# Altium PCB STM32F103RCT_EVK.PcbDoc (part 2 of 2)
Units mil, origin at the board's own origin, x right, y up, seen from the top; angles counter-clockwise.
Board outline 2500 x 1900 mil, 2 copper layers (Top Layer, Bottom Layer); 76 components, 81 nets, 397 pads, 87 vias.
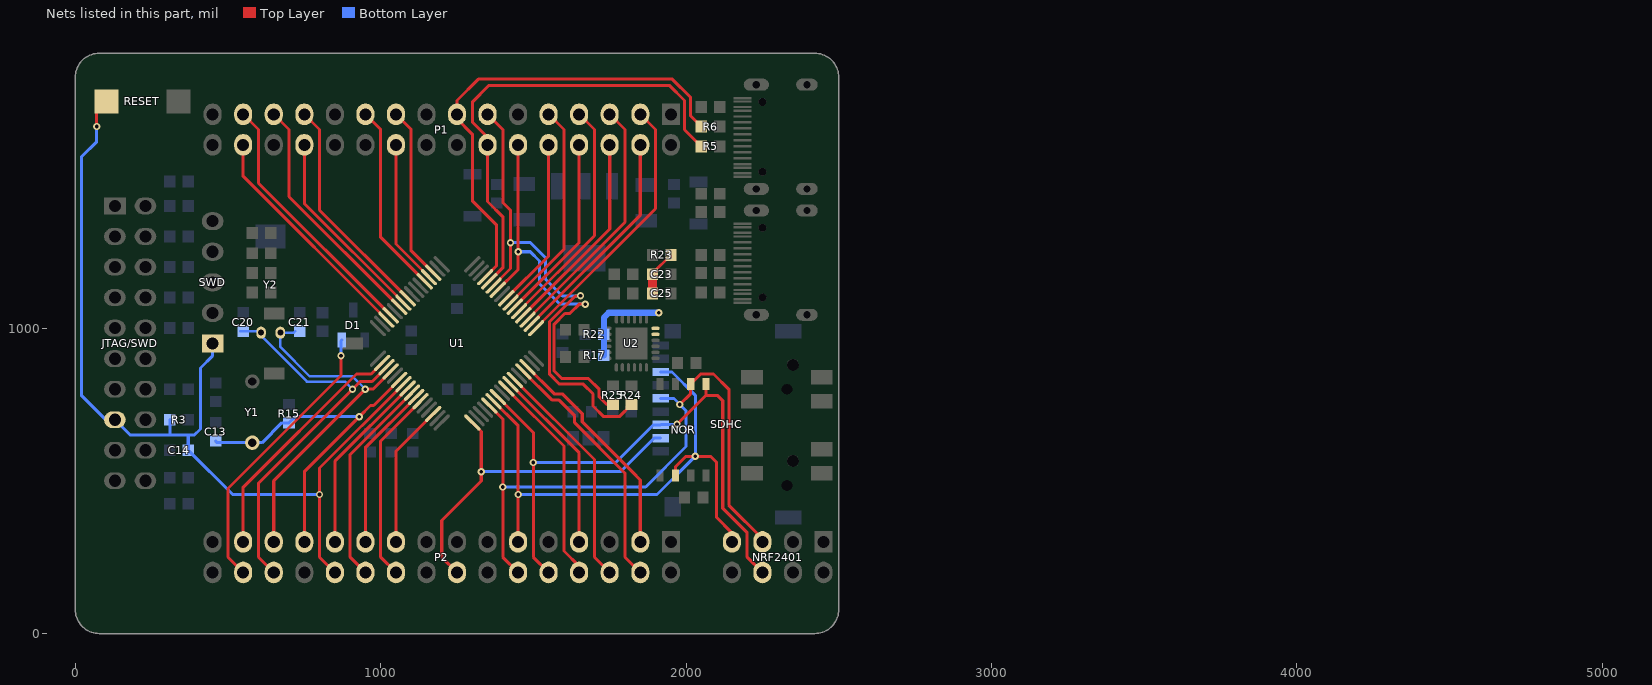
[diagram p2: the nets of this part, all layers, seen from the top]

## Via types
v1: diameter 24, hole 12, Top Layer to Bottom Layer, tented both sides, 87 vias

## Nets (pads, with @x,y where several pads share a name; then routed paths per layer and width w, separated by ;. In a path a pad name is that pad's centre, name@x,y a point inside that pad or via, vN(x,y) a via of type N, cw(c..) or ccw(c..) an arc to the next point about the centre after c; other vN are vias at no path point) (continued)
OSCOUT: C13.2 P2.25 R15.2 U1.6 Y1.1 | length 1175.3
  Top Layer w10: P2.25@750,300 750,530 924.8,704.8 v1@935.2,704.8 ; v1(930,710) 966.78,746.78 977.18,746.78 U1.6@1060.7,830.29
  Bottom Layer w10: C13.2@460,630 464.88,625.12 Y1.1@580,625.12 611.97,625.12 676.54,689.68 R15.2@700,689.68 720.32,710 v1(930,710)
PA0: P2.19 U1.14 | length 469.5
  Top Layer w10: P2.19@1050,300 1050,596.89 U1.14@1172.05,718.94
PA3: P2.16 SDHC.2 U1.17 | length 1211.5
  Top Layer w10: P2.16@1250,200 1200,250 1200,370 1330,500 1329.41,500.59 v1(1329.41,530) 1329.41,660.62 1330,661.21 U1.17@1300.11,691.1
  Bottom Layer w10: v1(1329.41,530) 1785,530 1894.84,639.84 SDHC.2@1916.93,639.84
PA5: NOR.6 NRF2401.5 P2.12 SDHC.5 U1.21 | length 2244.3
  Top Layer w10: U1.21@1355.79,746.78 1400,702.56 v1(1400,480) 1400,250 P2.12@1450,200 ; v1(1979.69,750) 2015,785.31 NOR.6@2015,817.23 2047.77,850 2090,850 2140,800 2140,420.31 2250,310.31 NRF2401.5@2250,300
  Bottom Layer w10: v1(1400,480) 1867.47,480 2000,612.53 2000,729.69 v1(1979.69,750) ; SDHC.5@1916.93,769.76 1960.24,769.76 v1@1979.84,750.16
PA6: NOR.2 NRF2401.7 P2.11 SDHC.7 U1.22 | length 1936
  Top Layer w10: U1.22@1369.71,760.7 1450,680.4 v1(1450,455.02) P2.11@1450,300 ; NOR.2@1965,518.02 1965,545 2000,580 v1(2030.1,580) 2080,580 2100,560 2100,380 2150,330 NRF2401.7@2150,300
  Bottom Layer w10: v1(1450,455.02) 1905.02,455.02 2030,580 v1(2030.1,580) 2030.1,779.9 1953.62,856.38 SDHC.7@1916.93,856.38
PA7: NOR.5 NRF2401.6 P2.10 SDHC.3 U1.23 | length 2015.3
  Top Layer w10: U1.23@1383.63,774.62 1500,658.24 v1(1500,560) 1500,250 P2.10@1550,200 ; v1(1970,685) 2065,780 ; NOR.5@2065,817.23 2065,780 ; NRF2401.6@2250,200 2200,250 2200,330 2120,410 2120,762.23 2102.23,780 2065,780
  Bottom Layer w10: v1(1500,560) 1770,560 1893.15,683.15 SDHC.3@1916.93,683.15 1918.78,685 v1(1970,685)
PA9: P1.12 R25.2 U1.42 | length 1372.2
  Top Layer w10: U1.42@1383.63,1125.38 1450.31,1192.06 1450,1192.37 v1(1450,1250) P1.12@1450,1600 ; v1(1670,1078.44) 1650.02,1078.44 1619.52,1047.95 1602.95,1047.95 1568.11,1013.11 1568.11,859.36 1592.47,835 1680,835 1715.22,799.78 1715.22,774.9 1740.43,749.68 R25.2@1760.47,749.68
  Bottom Layer w10: v1(1450,1250) 1490,1250 1520,1220 1520,1145.32 1586.87,1078.44 v1(1670,1078.44)
PA10: P1.13 R24.2 U1.43 | length 1631.8
  Top Layer w10: P1.13@1350,1700 1400,1650 1400,1411.47 1425.39,1386.08 v1(1425.39,1280) 1425.39,1194.98 U1.43@1369.71,1139.3 ; v1(1654.57,1105.43) 1654.13,1105 1637.37,1105 1552.11,1019.74 1552.11,850.12 1585.86,816.37 1663.63,816.37 1695,785 1695,745 1730,710 1781.42,710 R24.2@1821.1,749.68
  Bottom Layer w10: v1(1425.39,1280) 1490,1280 1540,1230 1540,1160.32 1594.88,1105.43 v1(1654.57,1105.43)
PA11: P1.14 R5.2 U1.44 | length 1557.8
  Top Layer w10: U1.44@1355.79,1153.22 1400,1197.44 1400,1364.61 1350,1414.61 P1.14@1350,1600 1350,1625 1300,1675 1300,1740 1355,1795 1945,1795 1995,1745 1995,1649.59 R5.2@2049.69,1594.9
PA12: P1.15 R6.2 U1.45 | length 1575.8
  Top Layer w10: U1.45@1341.87,1167.14 1380,1205.27 1380,1337.06 1300.11,1416.95 1300.11,1634.89 1250,1685 P1.15@1250,1700 1250,1745 1320,1815 1955,1815 2015,1755 2015,1694.59 R6.2@2049.69,1659.9
PB0: P2.7 U1.26 | length 609.4
  Top Layer w10: U1.26@1425.39,816.37 1650,591.76 P2.7@1650,300
PB1: P2.6 U1.27 | length 759
  Top Layer w10: U1.27@1439.3,830.29 1700,569.6 1700,250 P2.6@1750,200
PB5: P1.25 U1.57 | length 742.7
  Top Layer w10: P1.25@750,1700 800,1650 800,1386.08 U1.57@1088.54,1097.55
PB6: P1.26 U1.58 | length 650.8
  Top Layer w10: P1.26@750,1600 750,1408.24 U1.58@1074.62,1083.63
PB7: P1.27 U1.59 | length 800.4
  Top Layer w10: P1.27@650,1700 700,1650 700,1430.4 U1.59@1060.7,1069.71
PB8: P1.29 U1.61 | length 858.1
  Top Layer w10: P1.29@550,1700 600,1650 600,1474.73 U1.61@1032.86,1041.87
PB9: P1.30 U1.62 | length 766.3
  Top Layer w10: P1.30@550,1600 550,1496.89 U1.62@1018.94,1027.95
PB10: P2.4 U1.29 | length 829.9
  Top Layer w10: U1.29@1467.14,858.13 1560.28,765 1582.86,765 1635,712.86 1635,690.27 1800,525.27 1800,250 P2.4@1850,200
PB11: P2.3 U1.30 | length 740.6
  Top Layer w10: U1.30@1481.06,872.05 1568.11,785 1595,785 1660,720 1660,693.11 1825.1,528.01 1825.1,527.74 1850,502.84 P2.3@1850,300
PB12: P1.3 U1.33 | length 882.6
  Top Layer w10: U1.33@1508.9,1000.11 1900,1391.21 1900,1650 P1.3@1850,1700
PB13: P1.4 U1.34 | length 733
  Top Layer w10: U1.34@1494.98,1014.03 1494.98,1014.98 1850,1370 P1.4@1850,1600
PB14: P1.5 U1.35 | length 824.9
  Top Layer w10: U1.35@1481.06,1027.95 1800,1346.89 1800,1650 P1.5@1750,1700
PB15: P1.6 U1.36 | length 675.3
  Top Layer w10: U1.36@1467.14,1041.87 1750,1324.73 P1.6@1750,1600
PC0: P2.23 U1.8 | length 601.3
  Top Layer w10: P2.23@850,300 850,563.92 U1.8@1088.54,802.45
PC1: P2.22 U1.9 | length 693.1
  Top Layer w10: P2.22@950,200 900,250 900,586.08 U1.9@1102.45,788.53
PC2: P2.21 U1.10 | length 543.5
  Top Layer w10: P2.21@950,300 950,608.24 U1.10@1116.37,774.62
PC3: P2.20 U1.11 | length 635.4
  Top Layer w10: P2.20@1050,200 1000,250 1000,630.4 U1.11@1130.29,760.7
PC5: P2.8 U1.25 | length 701.3
  Top Layer w10: U1.25@1411.47,802.45 1600,613.92 1600,270 1650,220 P2.8@1650,200
PC6: P1.7 U1.37 | length 767.1
  Top Layer w10: U1.37@1453.22,1055.79 1700,1302.56 1700,1650 P1.7@1650,1700
PC7: P1.8 U1.38 | length 617.6
  Top Layer w10: U1.38@1439.3,1069.71 1650,1280.4 P1.8@1650,1600
PC8: P1.9 U1.39 | length 709.4
  Top Layer w10: U1.39@1425.39,1083.63 1600,1258.24 1600,1650 P1.9@1550,1700
PC9: P1.10 U1.40 | length 559.8
  Top Layer w10: U1.40@1411.47,1097.55 1550,1236.08 P1.10@1550,1600
PC10: P1.19 U1.51 | length 569.5
  Top Layer w10: P1.19@1050,1700 1100,1650 1100,1253.11 U1.51@1172.05,1181.06
PC11: P1.20 U1.52 | length 477.6
  Top Layer w10: P1.20@1050,1600 1050,1275.27 U1.52@1158.13,1167.14
PC12: P1.21 U1.53 | length 627.2
  Top Layer w10: P1.21@950,1700 1000,1650 1000,1297.44 U1.53@1144.21,1153.22
PC13: P2.29 U1.2 | length 802.7
  Top Layer w10: P2.29@550,300 550,479.21 920.79,850 969.05,850 U1.2@1005.02,885.97
PC14: C20.2 P2.28 U1.3 Y2.1 | length 1335.6
  Top Layer w10: P2.28@650,200 600,250 600,492.05 v1(907.95,800) 933.07,825.12 972,825.12 U1.3@1018.94,872.05
  Bottom Layer w8: C20.2@540,989.69 593.86,989.69 598.5,985.04 758.43,825.12 882.84,825.12 v1(907.95,800)
PC15: C21.2 P2.27 U1.4 Y2.2 | length 1164.2
  Top Layer w10: P2.27@650,300 650,500 v1(950,800) 974.73,800 U1.4@1032.86,858.13
  Bottom Layer w8: C21.2@720,989.69 715.35,985.04 Y2.2@671.5,985.04 671.5,938.19 767.69,842 908,842 v1(950,800)
RESET: C14.2 JTAG/SWD.15 P2.24 R3.1 RESET.1 SWD.1 U1.7 | length 3085.6
  Top Layer w10: v1(70,1660) 70,1710.1 RESET.1@101.89,1741.99 ; P2.24@850,200 800,250 v1(800,455) 800,541.76 U1.7@1074.62,816.37
  Bottom Layer w10: v1(70,1660) 70,1610 20,1560 20,779.76 99.76,700 JTAG/SWD.15@130,700 180,650 310,650 ; R3.1@309.69,700 309.69,650.31 310,650 ; SWD.1@450,950 450,909.69 410,869.69 410,670 390,650 370,650 ; v1(800,455) 515.32,455 C14.2@370.32,600 370,600.31 370,650 ; 310,650 370,650
VBAT: D1.2 P2.30 | length 935.8
  Top Layer w10: P2.30@550,200 500,250 500,475 870,845 v1(870,910)
  Bottom Layer w10: v1(870,910) 870,958.19 D1.2@872.6,960.79
VIO: C23.2 C25.2 R17.2 R22.2 R23.1 U2.5 U2.6 | length 460.3
  Top Layer w10: C23.2@1889.69,1176.25 1889.69,1178.95 R23.1@1950.32,1239.58
  Top Layer w30: C25.2@1889.69,1113.8 C23.2@1889.69,1176.25
  Bottom Layer w20: R17.2@1730.63,910.93 1730.63,1034.33 1746.61,1050.32 v1(1910,1050.32)
pads on no net: CON1.A5 CON1.A8 CON1.B2 CON1.B5 CON1.B8 CON2.A5 CON2.A8 CON2.B2 CON2.B5 CON2.B8 JTAG/SWD.11 JTAG/SWD.17 JTAG/SWD.19 SDHC.0 SDHC.1 SDHC.8 SDHC.9 SW1.0 U2.1 U2.10 U2.11 U2.12 U2.15 U2.16 U2.17 U2.18 U2.19 U2.22 U2.23 U2.24 Y2.3
copper on no net: | length 41061
  Top Layer w1: 20,142 123,142 ; 20,143 122,143 ; 20,144 122,144 ; 20,145 121,145 ; 20,146 121,146 ; 20,147 121,147 ; 20,148 121,148 ; 20,149 120,149 ; 20,150 120,150 ; 20,151 120,151 ; 20,152 120,152 ; 20,153 120,153 ; 20,154 120,154 ; 20,155 120,155 ; 20,156 120,156 ; 20,157 120,157 ; 20,158 120,158 ; 20,159 121,159 ; 20,160 121,160 ; 20,161 121,161 ; 20,162 121,162 ; 20,163 121,163 ; 20,164 121,164 ; 20,165 122,165 ; 20,166 122,166 ; 20,167 122,167 ; 21,134 128,134 ; 21,135 127,135 ; 21,136 126,136 ; 21,137 126,137 ; 21,138 125,138 ; 21,139 124,139 ; 21,140 123,140 ; 21,141 123,141 ; 21,168 123,168 ; 21,169 123,169 ; 21,170 123,170 ; 21,171 123,171 ; 21,172 124,172 ; 21,173 124,173 ; 21,174 125,174 ; 21,175 125,175 ; 21,176 126,176 ; 22,128 141,128 ; 22,129 137,129 ; 22,130 135,130 ; 22,131 133,131 ; 22,132 131,132 ; 22,133 130,133 ; 22,177 126,177 ; 22,178 127,178 ; 22,179 127,179 ; 22,180 128,180 ; 22,181 129,181 ; 23,123 288,123 ; 23,124 288,124 ; 23,125 288,125 ; 23,126 289,126 ; 23,127 145,127 ; 23,182 129,182 ; 23,183 130,183 ; 23,184 125,184 ; 23,185 122,185 ; 24,119 287,119 ; 24,120 288,120 ; 24,121 288,121 ; 24,122 288,122 ; 24,186 119,186 ; 24,187 118,187 ; 24,188 116,188 ; 24,189 115,189 ; 25,116 286,116 ; 25,117 287,117 ; 25,118 287,118 ; 25,190 113,190 ; 25,191 112,191 ; 25,192 111,192 ; 25,193 110,193 ; 26,113 285,113 ; 26,114 286,114 ; 26,115 286,115 ; 26,194 109,194 ; 26,195 108,195 ; 26,196 107,196 ; 27,110 86,110 ; 27,111 88,111 ; 27,112 91,112 ; 27,197 106,197 ; 27,198 105,198 ; 27,199 104,199 ; 28,107 84,107 ; 28,108 85,108 ; 28,109 86,109 ; 28,200 103,200 ; 28,201 102,201 ; 28,202 102,202 ; 29,105 84,105 ; 29,106 84,106 ; 29,203 101,203 ; 29,204 100,204 ; 30,102 84,102 ; 30,103 84,103 ; 30,104 84,104 ; 30,205 99,205 ; 30,206 99,206 ; 30,207 98,207 ; 31,99 84,99 ; 31,100 84,100 ; 31,101 84,101 ; 31,208 98,208 ; 31,209 97,209 ; 32,98 85,98 ; 32,210 96,210 ; 32,211 96,211 ; 33,96 87,96 ; 33,97 86,97 ; 33,212 95,212 ; 33,213 95,213 ; 34,93 93,93 ; 34,94 90,94 ; 34,95 88,95 ; 34,214 94,214 ; 34,215 94,215 ; 35,92 95,92 ; 35,216 93,216 ; 35,217 93,217 ; 36,90 97,90 ; 36,91 97,91 ; 36,218 92,218 ; 36,219 92,219 ; 37,88 83,88 ; 37,89 84,89 ; 37,220 92,220 ; 37,221 91,221 ; 38,86 84,86 ; 38,87 84,87 ; 38,222 91,222 ; 38,223 90,223 ; 39,84 84,84 ; 39,85 84,85 ; 39,224 90,224 ; 40,83 85,83 ; 40,225 90,225 ; 40,226 89,226 ; 41,81 86,81 ; 41,82 85,82 ; 41,227 89,227 ; 42,80 88,80 ; 42,228 89,228 ; 42,229 89,229 ; 43,78 268,78 ; 43,79 92,79 ; 43,230 88,230 ; 43,231 88,231 ; 44,77 267,77 ; 44,232 88,232 ; 45,75 266,75 ; 45,76 267,76 ; 45,233 88,233 ; 45,234 88,234 ; 46,74 265,74 ; 46,235 88,235 ; 47,73 265,73 ; 47,236 88,236 ; 48,71 263,71 ; 48,72 264,72 ; 48,237 88,237 ; 49,70 262,70 ; 49,238 88,238 ; 49,239 88,239 ; 50,69 262,69 ; 50,240 89,240 ; 51,68 261,68 ; 51,241 89,241 ; 52,67 260,67 ; 52,242 90,242 ; 53,66 259,66 ; 53,243 92,243 ; 54,64 257,64 ; 54,65 258,65 ; 54,244 93,244 ; 54,245 96,245 ; 55,63 256,63 ; 55,246 100,246 ; 56,62 255,62 ; 56,247 198,247 ; 57,61 254,61 ; 57,248 199,248 ; 58,60 253,60 ; 58,249 199,249 ; 59,59 253,59 ; 59,250 200,250 ; 60,58 252,58 ; 60,251 201,251 ; 61,57 250,57 ; 61,252 202,252 ; 62,56 249,56 ; 62,253 202,253 ; 63,55 248,55 ; 63,254 203,254 ; 64,54 247,54 ; 64,255 204,255 ; 65,53 246,53 ; 66,52 245,52 ; 66,256 205,256 ; 67,257 205,257 ; 68,51 244,51 ; 68,258 206,258 ; 69,50 243,50 ; 69,259 207,259 ; 70,49 242,49 ; 70,260 208,260 ; 71,48 240,48 ; 72,261 209,261 ; 73,47 239,47 ; 73,262 210,262 ; 74,46 238,46 ; 74,263 210,263 ; 75,45 236,45 ; 75,264 211,264 ; 76,44 235,44 ; 77,265 212,265 ; 78,43 234,43 ; 78,266 213,266 ; 79,42 232,42 ; 80,267 214,267 ; 81,41 231,41 ; 81,268 215,268 ; 82,40 229,40 ; 83,269 216,269 ; 84,39 227,39 ; 84,270 217,270 ; 86,38 226,38 ; 86,271 217,271 ; 87,37 224,37 ; 87,272 218,272 ; 89,36 223,36 ; 90,86 97,86 ; 90,87 98,87 ; 90,88 98,88 ; 90,89 98,89 ; 90,103 98,103 ; 90,273 220,273 ; 91,35 221,35 ; 91,85 97,85 ; 91,102 113,102 ; 91,104 97,104 ; 91,105 97,105 ; 91,106 97,106 ; 91,274 220,274 ; 92,101 113,101 ; 92,107 95,107 ; 93,34 219,34 ; 93,84 95,84 ; 93,100 113,100 ; 93,275 218,275 ; 95,33 217,33 ; 95,99 113,99 ; 95,276 216,276 ; 96,79 169,79 ; 97,32 215,32 ; 97,277 214,277 ; 98,98 113,98 ; 98,112 285,112 ; 99,31 212,31 ; 99,80 113,80 ; 99,97 113,97 ; 99,278 212,278 ; 100,111 106,111 ; 101,30 210,30 ; 101,81 113,81 ; 101,96 113,96 ; 102,82 113,82 ; 102,109 106,109 ; 102,110 106,110 ; 102,279 210,279 ; 103,83 113,83 ; 103,94 113,94 ; 103,95 113,95 ; 103,103 113,103 ; 103,107 106,107 ; 103,108 106,108 ; 104,29 208,29 ; 104,84 113,84 ; 104,85 113,85 ; 104,92 113,92 ; 104,93 113,93 ; 104,104 113,104 ; 104,105 113,105 ; 104,106 113,106 ; 104,280 208,280 ; 105,86 113,86 ; 105,87 113,87 ; 105,88 113,88 ; 105,89 113,89 ; 105,90 113,90 ; 105,91 113,91 ; 106,28 206,28 ; 107,281 205,281 ; 109,27 203,27 ; 109,282 203,282 ; 112,26 200,26 ; 112,283 199,283 ; 113,246 197,246 ; 114,25 198,25 ; 115,284 197,284 ; 118,24 194,24 ; 118,285 193,285 ; 119,80 130,80 ; 120,81 129,81 ; 120,82 129,82 ; 120,83 129,83 ; 120,84 129,84 ; 120,85 129,85 ; 120,86 129,86 ; 120,87 129,87 ; 120,88 129,88 ; 120,89 129,89 ; 120,90 129,90 ; 120,91 129,91 ; 120,92 129,92 ; 120,93 129,93 ; 120,94 129,94 ; 120,95 129,95 ; 120,96 129,96 ; 120,97 129,97 ; 120,98 129,98 ; 120,99 129,99 ; 120,100 129,100 ; 120,101 129,101 ; 120,102 129,102 ; 120,103 129,103 ; 120,104 129,104 ; 120,105 129,105 ; 120,106 129,106 ; 120,245 197,245 ; 121,23 190,23 ; 122,286 190,286 ; 124,244 196,244 ; 125,22 186,22 ; 126,287 186,287 ; 127,107 129,107 ; 127,108 129,108 ; 127,109 129,109 ; 127,110 129,110 ; 127,111 129,111 ; 128,243 195,243 ; 131,21 181,21 ; 131,242 195,242 ; 131,288 181,288 ; 134,241 194,241 ; 135,20 175,20 ; 135,80 141,80 ; 135,81 141,81 ; 135,82 141,82 ; 135,83 140,83 ; 135,84 140,84 ; 135,93 138,93 ; 135,94 138,94 ; 135,99 137,99 ; 135,100 137,100 ; 136,85 140,85 ; 136,86 140,86 ; 136,87 140,87 ; 136,88 139,88 ; 136,89 139,89 ; 136,90 139,90 ; 136,91 139,91 ; 136,92 138,92 ; 136,95 138,95 ; 136,96 138,96 ; 136,97 137,97 ; 136,98 137,98 ; 138,240 193,240 ; 138,289 175,289 ; 139,111 148,111 ; 140,105 147,105 ; 140,106 147,106 ; 140,107 147,107 ; 140,108 147,108 ; 140,109 148,109 ; 140,110 148,110 ; 140,239 193,239 ; 141,101 146,101 ; 141,102 146,102 ; 141,103 146,103 ; 141,104 147,104 ; 142,96 145,96 ; 142,97 145,97 ; 142,98 145,98 ; 142,99 146,99 ; 142,100 146,100 ; 142,238 192,238 ; 143,92 144,92 ; 143,93 144,93 ; 143,94 144,94 ; 143,95 145,95 ; 145,19 167,19 ; 145,237 191,237 ; 146,80 152,80 ; 147,81 152,81 ; 147,82 152,82 ; 147,83 152,83 ; 147,84 152,84 ; 147,85 152,85 ; 148,86 152,86 ; 148,87 152,87 ; 148,88 152,88 ; 148,89 152,89 ; 148,90 152,90 ; 148,236 191,236 ; 148,290 165,290 ; 149,91 152,91 ; 149,92 152,92 ; 149,93 152,93 ; 149,94 152,94 ; 150,95 152,95 ; 150,96 152,96 ; 150,97 152,97 ; 150,98 152,98 ; 150,235 175,235 ; 151,99 152,99 ; 151,100 152,100 ; 151,101 152,101 ; 152,234 174,234 ; 154,233 173,233 ; 156,127 289,127 ; 156,232 173,232 ; 158,80 166,80 ; 158,81 164,81 ; 158,82 164,82 ; 158,83 163,83 ; 158,84 162,84 ; 158,85 162,85 ; 158,86 162,86 ; 158,87 162,87 ; 158,88 162,88 ; 158,89 177,89 ; 158,90 177,90 ; 158,91 176,91 ; 158,92 176,92 ; 158,93 175,93 ; 158,94 174,94 ; 158,95 169,95 ; 158,96 168,96 ; 158,97 169,97 ; 158,98 173,98 ; 158,99 174,99 ; 158,100 175,100 ; 158,101 175,101 ; 158,102 176,102 ; 158,103 162,103 ; 158,104 162,104 ; 158,105 162,105 ; 158,106 163,106 ; 158,107 163,107 ; 158,108 163,108 ; 158,109 164,109 ; 158,110 165,110 ; 158,111 167,111 ; 158,231 173,231 ; 160,128 289,128 ; 160,230 173,230 ; 162,229 172,229 ; 164,129 290,129 ; 164,228 172,228 ; 165,86 176,86 ; 165,87 177,87 ; 165,88 177,88 ; 165,103 176,103 ; 165,227 172,227 ; 166,84 176,84 ; 166,85 176,85 ; 166,104 176,104 ; 166,105 176,105 ; 166,106 175,106 ; 166,226 172,226 ; 167,83 174,83 ; 167,107 175,107 ; 167,130 290,130 ; 168,108 174,108 ; 168,131 290,131 ; 168,225 172,225 ; 169,82 172,82 ; 169,224 172,224 ; 170,132 290,132 ; 171,79 269,79 ; 171,133 290,133 ; 171,223 172,223 ; 172,134 290,134 ; 173,135 291,135 ; 174,111 189,111 ; 174,136 291,136 ; 175,80 184,80 ; 175,137 291,137 ; 176,96 195,96 ; 176,97 196,97 ; 176,110 187,110 ; 176,138 291,138 ; 176,235 190,235 ; 177,81 184,81 ; 177,95 194,95 ; 177,98 197,98 ; 177,109 186,109 ; 177,139 291,139 ; 177,140 291,140 ; 178,82 184,82 ; 178,94 192,94 ; 178,99 197,99 ; 178,100 198,100 ; 178,107 185,107 ; 178,108 186,108 ; 178,141 291,141 ; 178,234 190,234 ; 179,83 184,83 ; 179,84 184,84 ; 179,85 184,85 ; 179,93 191,93 ; 179,101 198,101 ; 179,102 184,102 ; 179,103 184,103 ; 179,104 184,104 ; 179,105 184,105 ; 179,106 185,106 ; 179,142 291,142 ; 179,143 291,143 ; 179,233 189,233 ; 180,86 185,86 ; 180,87 186,87 ; 180,88 186,88 ; 180,89 187,89 ; 180,90 188,90 ; 180,91 189,91 ; 180,92 190,92 ; 180,144 291,144 ; 180,145 198,145 ; 180,146 198,146 ; 180,232 188,232 ; 181,147 197,147 ; 181,148 197,148 ; 181,231 188,231 ; 182,149 196,149 ; 182,150 196,150 ; 182,230 187,230 ; 183,151 195,151 ; 183,152 195,152 ; 183,153 194,153 ; 183,154 194,154 ; 183,228 186,228 ; 183,229 186,229 ; 184,155 194,155 ; 184,156 193,156 ; 184,157 193,157 ; 184,158 192,158 ; 184,227 185,227 ; 185,159 192,159 ; 185,160 192,160 ; 185,161 192,161 ; 186,102 198,102 ; 186,162 191,162 ; 186,163 191,163 ; 186,164 191,164 ; 186,165 190,165 ; 187,83 271,83 ; 187,84 272,84 ; 187,103 198,103 ; 187,104 198,104 ; 187,105 198,105 ; 187,166 190,166 ; 187,167 190,167 ; 187,168 189,168 ; 187,169 189,169 ; 187,170 189,170 ; 188,85 273,85 ; 188,86 273,86 ; 188,106 197,106 ; 188,107 197,107 ; 188,171 189,171 ; 189,87 274,87 ; 190,88 274,88 ; 190,108 196,108 ; 191,89 275,89 ; 192,90 276,90 ; 192,109 194,109 ; 193,91 276,91 ; 195,92 277,92 ; 195,111 285,111 ; 195,173 196,173 ; 196,93 277,93 ; 196,170 199,170 ; 196,171 198,171 ; 196,172 197,172 ; 197,94 277,94 ; 197,166 203,166 ; 197,167 202,167 ; 197,168 201,168 ; 197,169 200,169 ; 198,95 278,95 ; 198,110 284,110 ; 198,162 207,162 ; 198,163 206,163 ; 198,164 205,164 ; 198,165 204,165 ; 199,96 279,96 ; 199,109 284,109 ; 199,156 214,156 ; 199,157 213,157 ; 199,158 212,158 ; 199,159 210,159 ; 199,160 209,160 ; 199,161 208,161 ; 200,97 279,97 ; 200,98 279,98 ; 200,106 283,106 ; 200,107 283,107 ; 200,108 284,108 ; 200,145 291,145 ; 200,146 291,146 ; 200,147 292,147 ; 200,148 229,148 ; 200,149 226,149 ; 200,150 224,150 ; 200,151 222,151 ; 200,152 220,152 ; 200,153 218,153 ; 200,154 217,154 ; 200,155 215,155 ; 201,80 270,80 ; 201,81 270,81 ; 201,82 271,82 ; 201,99 280,99 ; 201,100 280,100 ; 201,101 281,101 ; 201,102 281,102 ; 201,103 282,103 ; 201,104 282,104 ; 201,105 282,105 ; 239,212 279,212 ; 240,211 279,211 ; 240,213 279,213 ; 241,214 278,214 ; 242,148 292,148 ; 242,210 280,210 ; 242,215 278,215 ; 243,216 277,216 ; 244,149 292,149 ; 244,209 280,209 ; 244,217 276,217 ; 244,218 276,218 ; 245,219 276,219 ; 246,208 281,208 ; 246,220 275,220 ; 246,221 274,221 ; 247,150 292,150 ; 247,207 281,207 ; 247,222 274,222 ; 248,151 292,151 ; 248,223 273,223 ; 248,224 273,224 ; 249,206 282,206 ; 249,225 272,225 ; 249,226 271,226 ; 250,152 292,152 ; 250,205 282,205 ; 250,227 271,227 ; 250,228 270,228 ; 251,153 292,153 ; 251,229 269,229 ; 251,230 269,230 ; 251,231 268,231 ; 252,204 282,204 ; 252,232 267,232 ; 252,233 267,233 ; 253,154 292,154 ; 253,203 283,203 ; 253,234 266,234 ; 253,235 265,235 ; 253,236 264,236 ; 254,155 292,155 ; 254,202 283,202 ; 254,237 264,237 ; 254,238 263,238 ; 254,239 262,239 ; 255,156 292,156 ; 255,240 261,240 ; 255,241 260,241 ; 255,242 260,242 ; 255,243 259,243 ; 256,157 292,157 ; 256,200 284,200 ; 256,201 284,201 ; 256,244 258,244 ; 256,245 257,245 ; 257,158 292,158 ; 258,159 292,159 ; 258,160 292,160 ; 258,199 284,199 ; 259,161 292,161 ; 259,198 285,198 ; 260,162 291,162 ; 260,196 285,196 ; 260,197 285,197 ; 261,163 291,163 ; 261,164 291,164 ; 261,195 286,195 ; 262,165 291,165 ; 262,194 286,194 ; 263,166 291,166 ; 263,167 291,167 ; 263,192 287,192 ; 263,193 286,193 ; 264,168 291,168 ; 264,169 291,169 ; 264,190 287,190 ; 264,191 287,191 ; 265,170 291,170 ; 265,171 291,171 ; 265,172 291,172 ; 265,187 288,187 ; 265,188 288,188 ; 265,189 287,189 ; 266,173 291,173 ; 266,174 290,174 ; 266,175 290,175 ; 266,176 290,176 ; 266,185 288,185 ; 266,186 288,186 ; 267,177 290,177 ; 267,178 290,178 ; 267,179 290,179 ; 267,180 289,180 ; 267,181 289,181 ; 267,182 289,182 ; 267,183 289,183 ; 267,184 289,184

## Polygon pours and split planes (outlines as drawn)
GND on Bottom Layer "BOTTOM_GND" (solid, remove dead copper, pour order 0): 2472.5,0 2500,27.5 2500,1870 2470,1900 30,1900 0,1870 0,30 30,0
GND on Top Layer "TOP_GND" (solid, remove dead copper, pour order 2): 2480,0 2500,20 2500,1870 2470,1900 30,1900 0,1870 0,305 310,305 310,36 346,0

## Keep-outs
Keep-Out Layer:
  the board outline again, w6

## Other copper
Top Layer:
  region net +5V: 2410,755 2410,590 2470,590 2480,600 2480,770 2449.3,770 2440,760.7
  region net 3V3: 1821.1,705.02 1800,705.02 1760.47,665.49 1760.47,641.21 1771.68,630 1793.92,630 1830.95,667.03 1830.95,690
  region net 5V_IN: 2180,520 2180,440.12 2235.12,385 2430,385 2475,430 2475,515 2470,510 2421.25,510 2421.25,480.94 2390.63,450.31 2270.74,450.31 2237.07,483.99 2237.07,518.02
  region net GND: 1935,1183.64 1935,1086.58 1945.79,1075.79 1960,1075.79 1970,1085.79 1970,1180 1960,1190 1940,1190
  region net GND: 1750,1182.98 1750,1080 1755,1075 1775,1075 1780,1080 1780,1182.98
  region net VIO: 1899.84,979.53 1904.37,975 1925.47,975 1935,984.53 1935,1064.71 1905,1094.71 1905,1100 1884.21,1100 1880,1095.79 1880,1088.13 1889.69,1078.44 1889.69,1019.34 1899.84,1009.19
  region net 5V_USB: 1870.32,1035.79 1850,1035.79 1845,1040.79 1845,1060.79 1810,1095.79 1810,1110 1840,1110 1875,1075 1875,1040.47
  region net 5V_USB: 2295,1123.54 2295,1006.91 2295,1005 2164.66,874.66 2164.66,820.34 2180,805 2285,805 2310,830 2310,905 2320,915 2375.79,915 2395,895.79 2395,815.31 2405.32,805 2475,805 2485,815 2485,885.04 2430,940.04 2346.44,1023.6 2346.44,1090 2378.49,1119.61
  region net 5V_USB: 2300,1535 2291.03,1526.03 2291.03,1291.56 2321.3,1291.56 2336.52,1276.34 2349.82,1276.34 2349.82,1658.24 2343.06,1665 2300,1665 2291.03,1656.03 2291.03,1525
  region net 5V_USB: 2231.81,1306.52 2229.66,1304.37 2229.66,1293.11 2232.98,1290 2250,1290
  region net 5V_USB: 2237.05,1305 2237.07,1299.08 2285,1251.16 2285,1185 2227.46,1127.46 2235.31,1119.61 2378.49,1119.61 2378.49,1247.67 2321.16,1305
  region net 5V_USB: 2229.52,1720.39 2229.66,1688.4 2259.66,1658.4 2259.66,1613.45 2229.66,1583.45 2229.66,1542.41 2237.06,1535 2345,1535 2345,1663.06 2287.67,1720.39
  region net 5V_USB: 2235.77,1711.99
  region net GND: 2160,1332.75 2160.69,1333.44 2210,1333.44 2210,1352.75 2220,1362.75 2270,1362.75 2280,1372.75 2280,1412.75 2270,1422.75 2170,1422.75 2160,1412.75
  region net GND: 2160,1095.79 2160.69,1095.1 2210,1095.1 2210,1075.79 2220,1065.79 2270,1065.79 2280,1055.79 2280,1015.79 2270,1005.79 2170,1005.79 2160,1015.79
  region net GND: 2159.66,1507.67 2160.34,1506.99 2209.66,1506.99 2209.66,1487.67 2219.66,1477.67 2269.66,1477.67 2279.66,1467.67 2279.66,1427.67 2269.66,1417.67 2169.66,1417.67 2159.66,1427.67
  region net GND: 2160,1740 2160.69,1740.69 2210,1740.69 2210,1760 2220,1770 2270,1770 2280,1780 2280,1820 2270,1830 2170,1830 2160,1820
Bottom Layer:
  region net 3V3: 1500,1310 1566.61,1243.39 1566.61,1173.63 1600.24,1140 1685,1140 1745,1200 1795,1200 1810.24,1215.24 1810.24,1359.76 1785.08,1384.92 1519.92,1384.92 1495,1360 1500,1355
  region net +5V: 2460,814.44 2435.46,789.89 2410,789.89 2395.51,775.41 2395.51,644.38 2410,629.89 2470,629.89 2485,644.89 2485,796.85
  region net 5V_IN: 1930,240 1910,220 1910,180 1930,160 2070,160 2090,180 2090,370 2105,385 2255,385 2285.43,415.43 2345.43,415.43 2360,430 2360,440 2345,455 2305,455 2274.96,485.04 2070.04,485.04 2010,425 2010,260 1990,240
  region net 3V3: 1735,625.12 1790.12,625.12 1830,665 1830,716.77 1820.32,726.46 1746.61,652.76 1746.61,645

## Silkscreen, mask and mechanical layers (free items; w line width, h text height)
Top Overlay:
  lines w8: 400,250 2000,250 ; 400,1650 2000,1650 ; 1900,150 1900,350 ; 1900,1550 1900,1750
  lines w10: 2044.25,100 2070,60 ; 2070,350 2070,60 ; 2095.75,100 2070,60
  text "PC12" at 940,1880 h32 r270
  text "PC10" at 1039.25,1880 h32 r270
  text "PA14" at 1140,1880 h32 r270
  text "PA12" at 1240,1880 h32 r270
  text "PA10" at 1340,1880 h32 r270
  text "PB14" at 1734.65,1880 h32 r270
  text "PB12" at 1840,1880 h32 r270
  text "GND" at 440,1860 h32 r270
  text "PB8" at 540,1860 h32 r270
  text "PB7" at 640,1860 h32 r270
  text "PB5" at 740,1860 h32 r270
  text "PB3" at 840,1860 h32 r270
  text "PA8" at 1438.58,1860 h32 r270
  text "PC8" at 1538.9,1860 h32 r270
  text "PC6" at 1631.1,1860 h32 r270
  text "GND" at 1940,1860 h32 r270
  text "USB" at 2020,1770 h40
  text "BOOT0" at 640,1540 h32 r270
  text "3.3V" at 440,1520 h32 r270
  text "PB9" at 540,1520 h32 r270
  text "PB6" at 740,1520 h32 r270
  text "PB4" at 840,1520 h32 r270
  text "PD2" at 940,1520 h32 r270
  text "PC11" at 1039.25,1520 h32 r270
  text "PA15" at 1140,1520 h32 r270
  text "PA13" at 1240,1520 h32 r270
  text "PA11" at 1340,1520 h32 r270
  text "PA9" at 1440,1520 h32 r270
  text "PC9" at 1538.9,1520 h32 r270
  text "PC7" at 1631.81,1520 h32 r270
  text "PB15" at 1734.65,1520 h32 r270
  text "PB13" at 1840,1520 h32 r270
  text "5VOUT" at 1940,1520 h32 r270
  text "PWR" at 2020,1490 h40
  text "TTL" at 2020,1282.67 h40
  text "STM32xxR" at 850,1268.5 h180
  text "D2" at 700,1220 h40
  text "1" at 880,1060 h50
  text "RX" at 1590,1034.65 h40
  text "A8" at 520,1020 h40
  text "USB5V" at 2230,950 h40
  text "JLCJLC" at 1100,925 h50
  text "TX" at 1580,810 h40
  text "0" at 870,780 h50
  text "BOOT0-CFG" at 625.75,690 h40
  text "OFF" at 2170,620 h40 r90
  text "OSCOUT" at 740,540 h32 r270
  text "PC13" at 540,480 h32 r270
  text "PC15" at 640,480 h32 r270
  text "PB11" at 1840,480 h32 r270
  text "GND" at 440,460 h32 r270
  text "PC0" at 840,460 h32 r270
  text "PC2" at 940,460 h32 r270
  text "PA0" at 1040,460 h32 r270
  text "PA2" at 1140,460 h32 r270
  text "PA4" at 1240,460 h32 r270
  text "GND" at 1340,460 h32 r270
  text "PA6" at 1440,460 h32 r270
  text "PC4" at 1540,460 h32 r270
  text "PB0" at 1640,460 h32 r270
  text "PB2" at 1740,460 h32 r270
  text "GND" at 1923.46,460 h32 r270
  text "5V_IN" at 2230,360 h40
  text "OSCIN" at 740,140 h32 r270
  text "5V IN" at 1940,140 h32 r270
  text "3.3V" at 440,120 h32 r270
  text "VBAT" at 540,120 h32 r270
  text "PC14" at 640,120 h32 r270
  text "RST" at 840,120 h32 r270
  text "PC1" at 940,120 h32 r270
  text "PC3" at 1040,120 h32 r270
  text "PA1" at 1140,120 h32 r270
  text "PA3" at 1240,120 h32 r270
  text "3.3V" at 1340,120 h32 r270
  text "PA5" at 1440,120 h32 r270
  text "PA7" at 1540,120 h32 r270
  text "PC5" at 1640,120 h32 r270
  text "PB1" at 1740,120 h32 r270
  text "PB10" at 1840,120 h32 r270
Bottom Overlay:
  text "0" at 1540,615 h40
  text "1" at 1810,615 h40
  text "BOOT1-CFG" at 1850.43,530 h40
  text "DAT:19.5.7" at 2400,50 h80

## Text inside footprints (layer, text, board x,y; h text height)
SDHC: Top Overlay "MiniSD" at 2326.3,815.24 h59.06 r270; Bottom Overlay "MiniSD" at 2326.67,637.3 h59.06 r270